# Altium PCB PCB1.PcbDoc
Units mm, origin at the board's own origin, x right, y up, seen from the top; angles counter-clockwise.
Board outline 80 x 80 mm, 2 copper layers (Top Layer, Bottom Layer); 45 components, 26 nets, 177 pads, 19 vias.
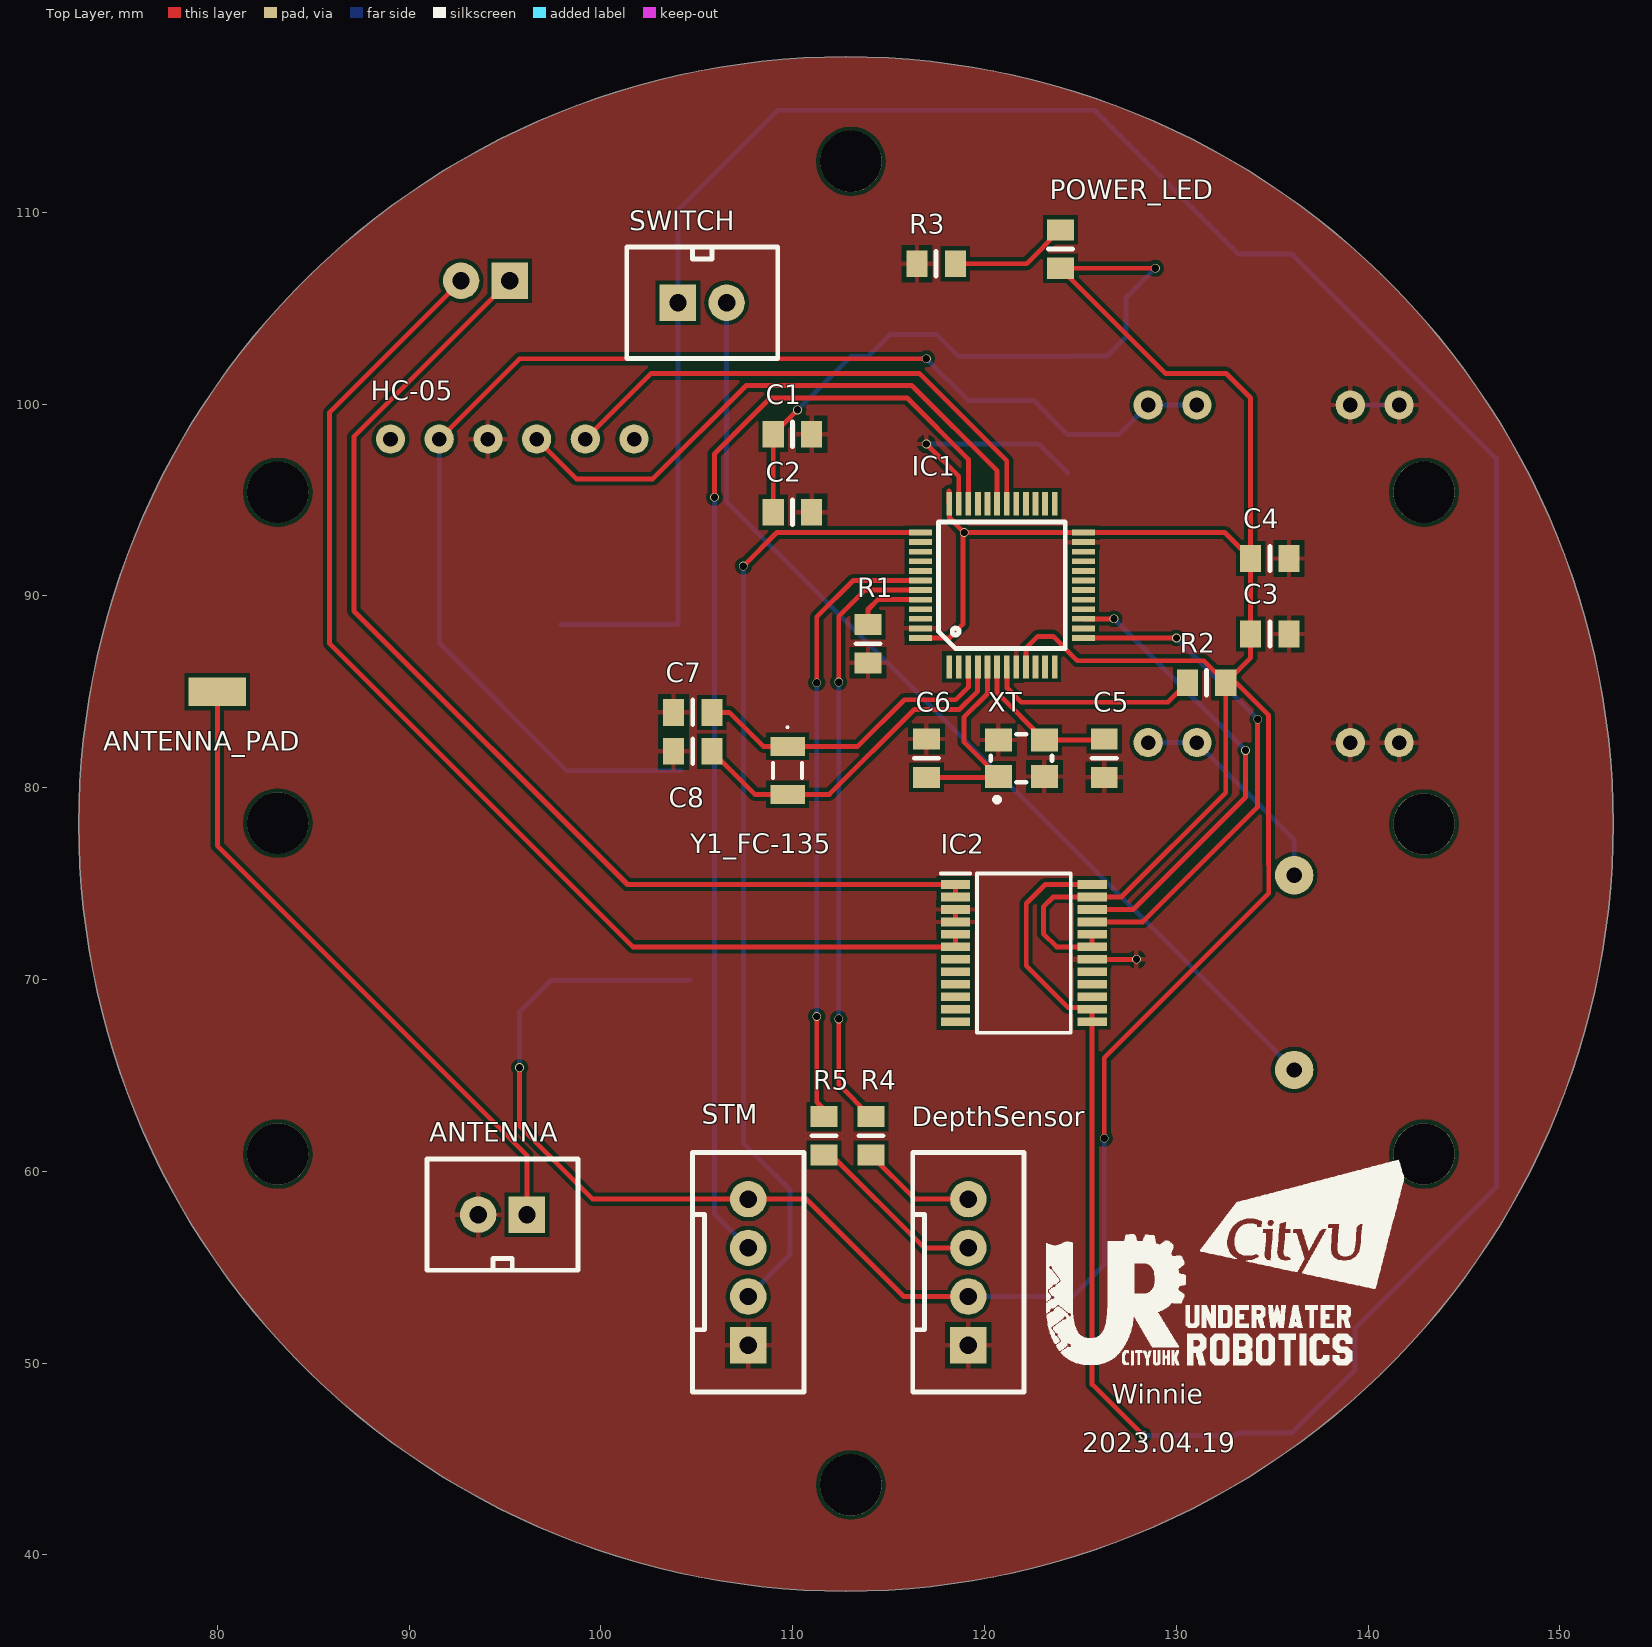
[diagram p0: Top Layer view]
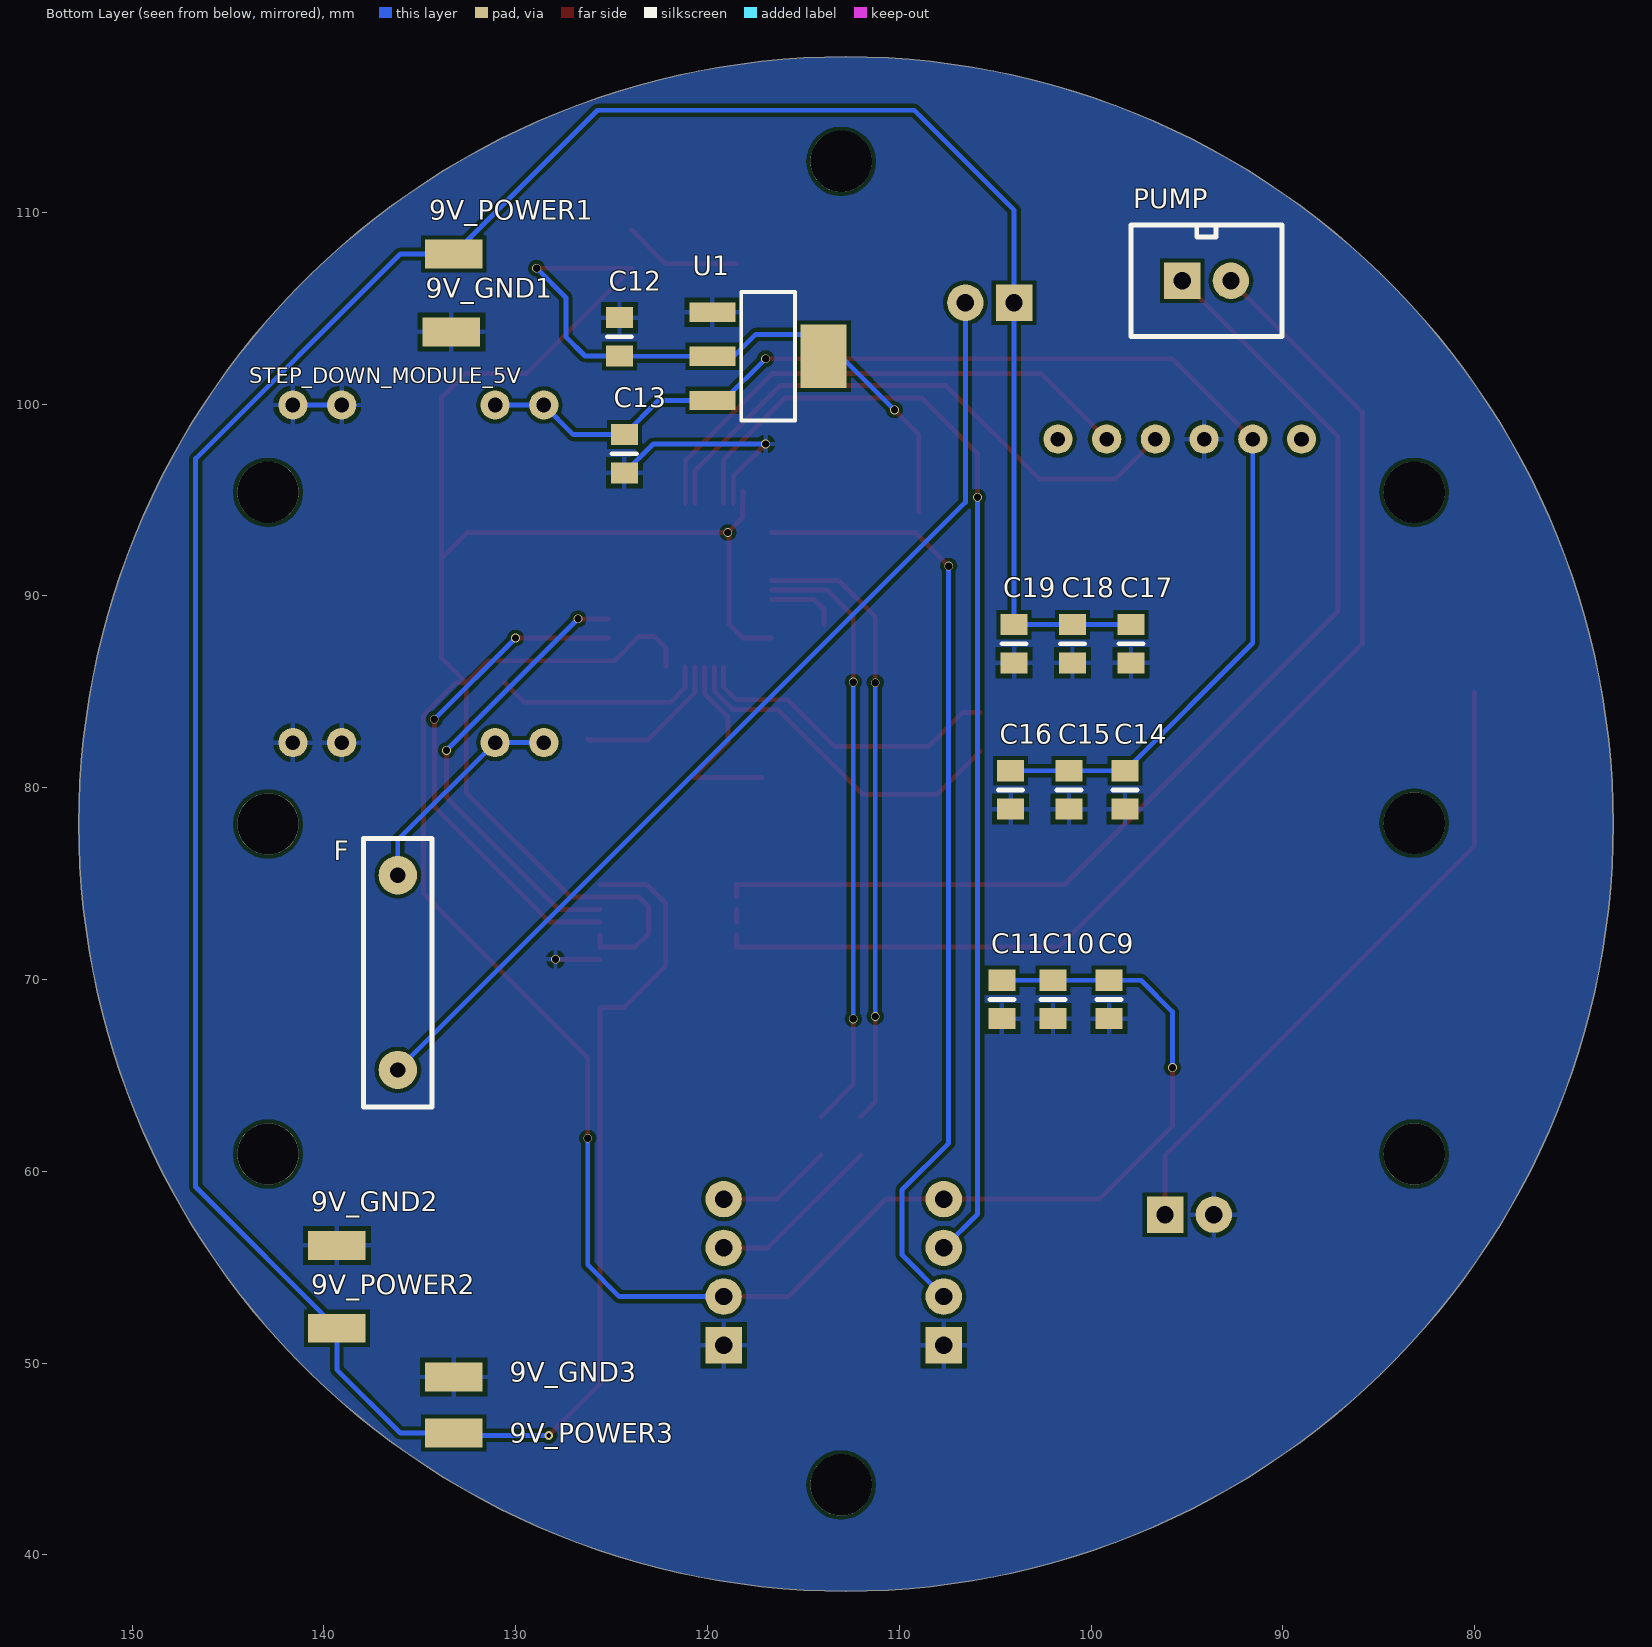
[diagram p1: Bottom Layer view, seen from below]
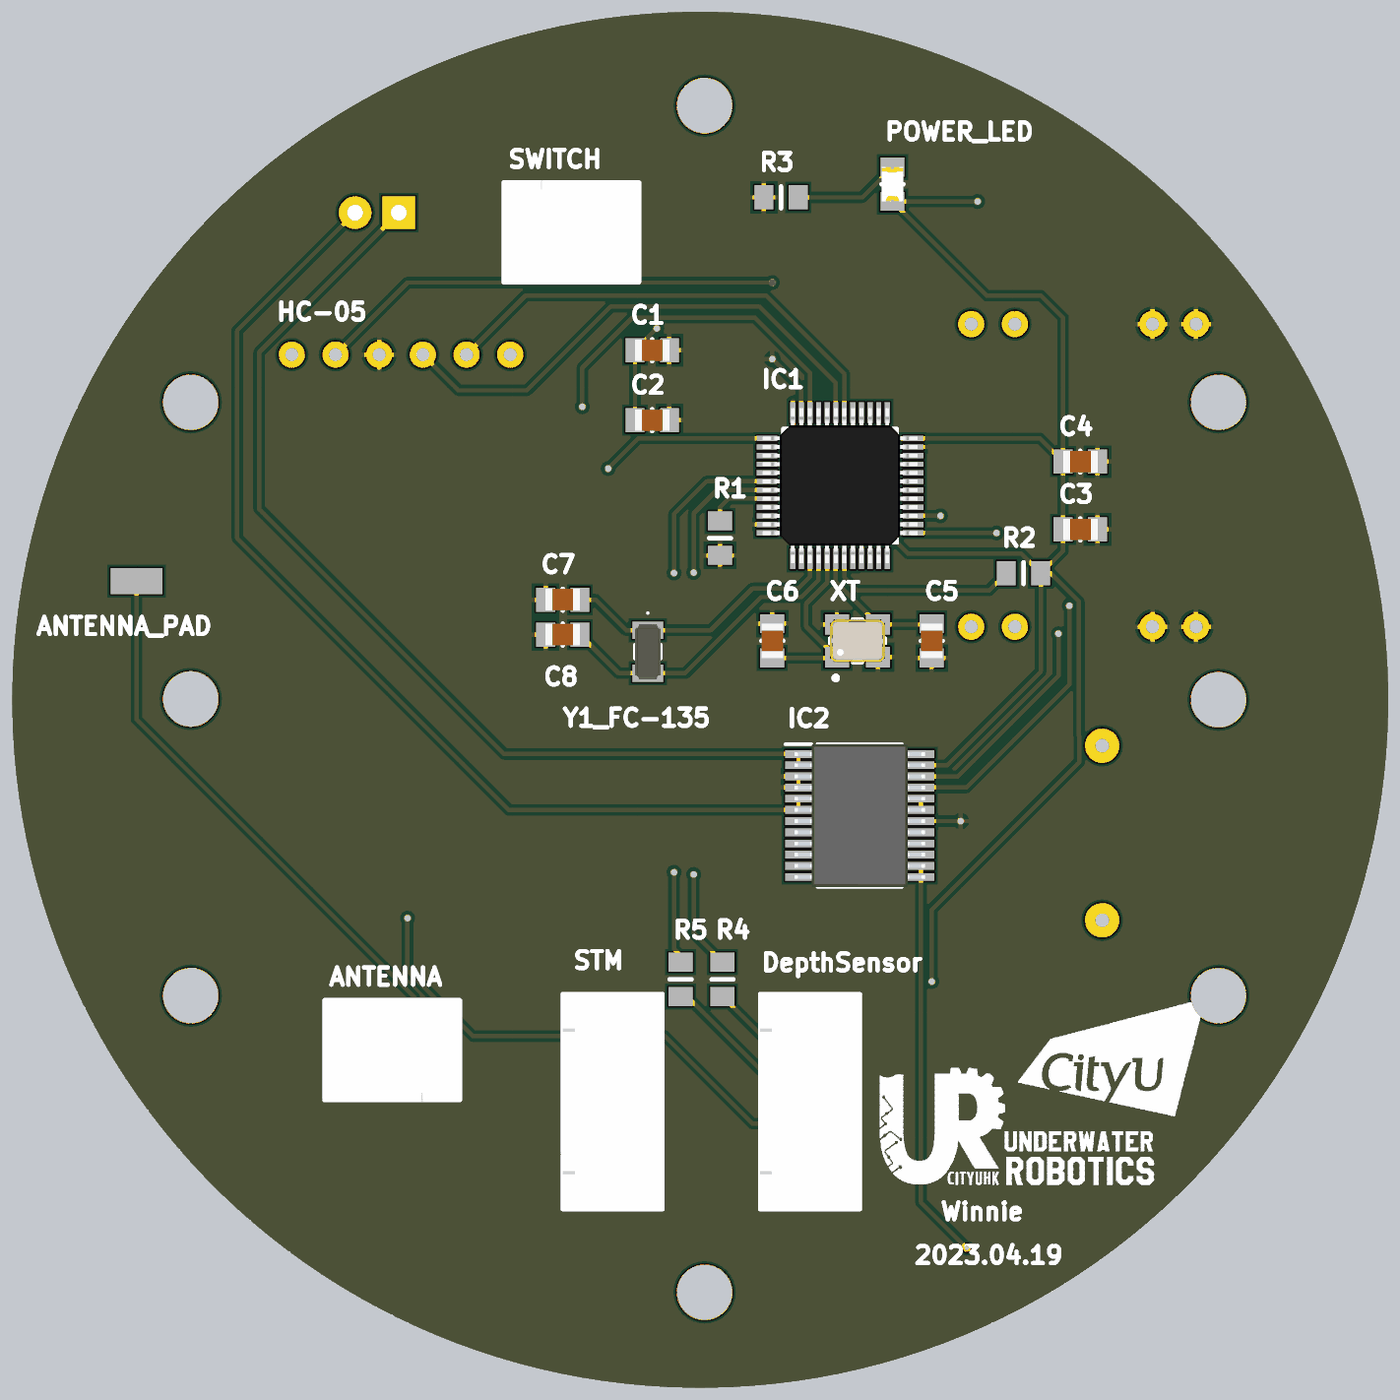
[diagram p2: 3D render of the assembled board from above, using the file's embedded part models]
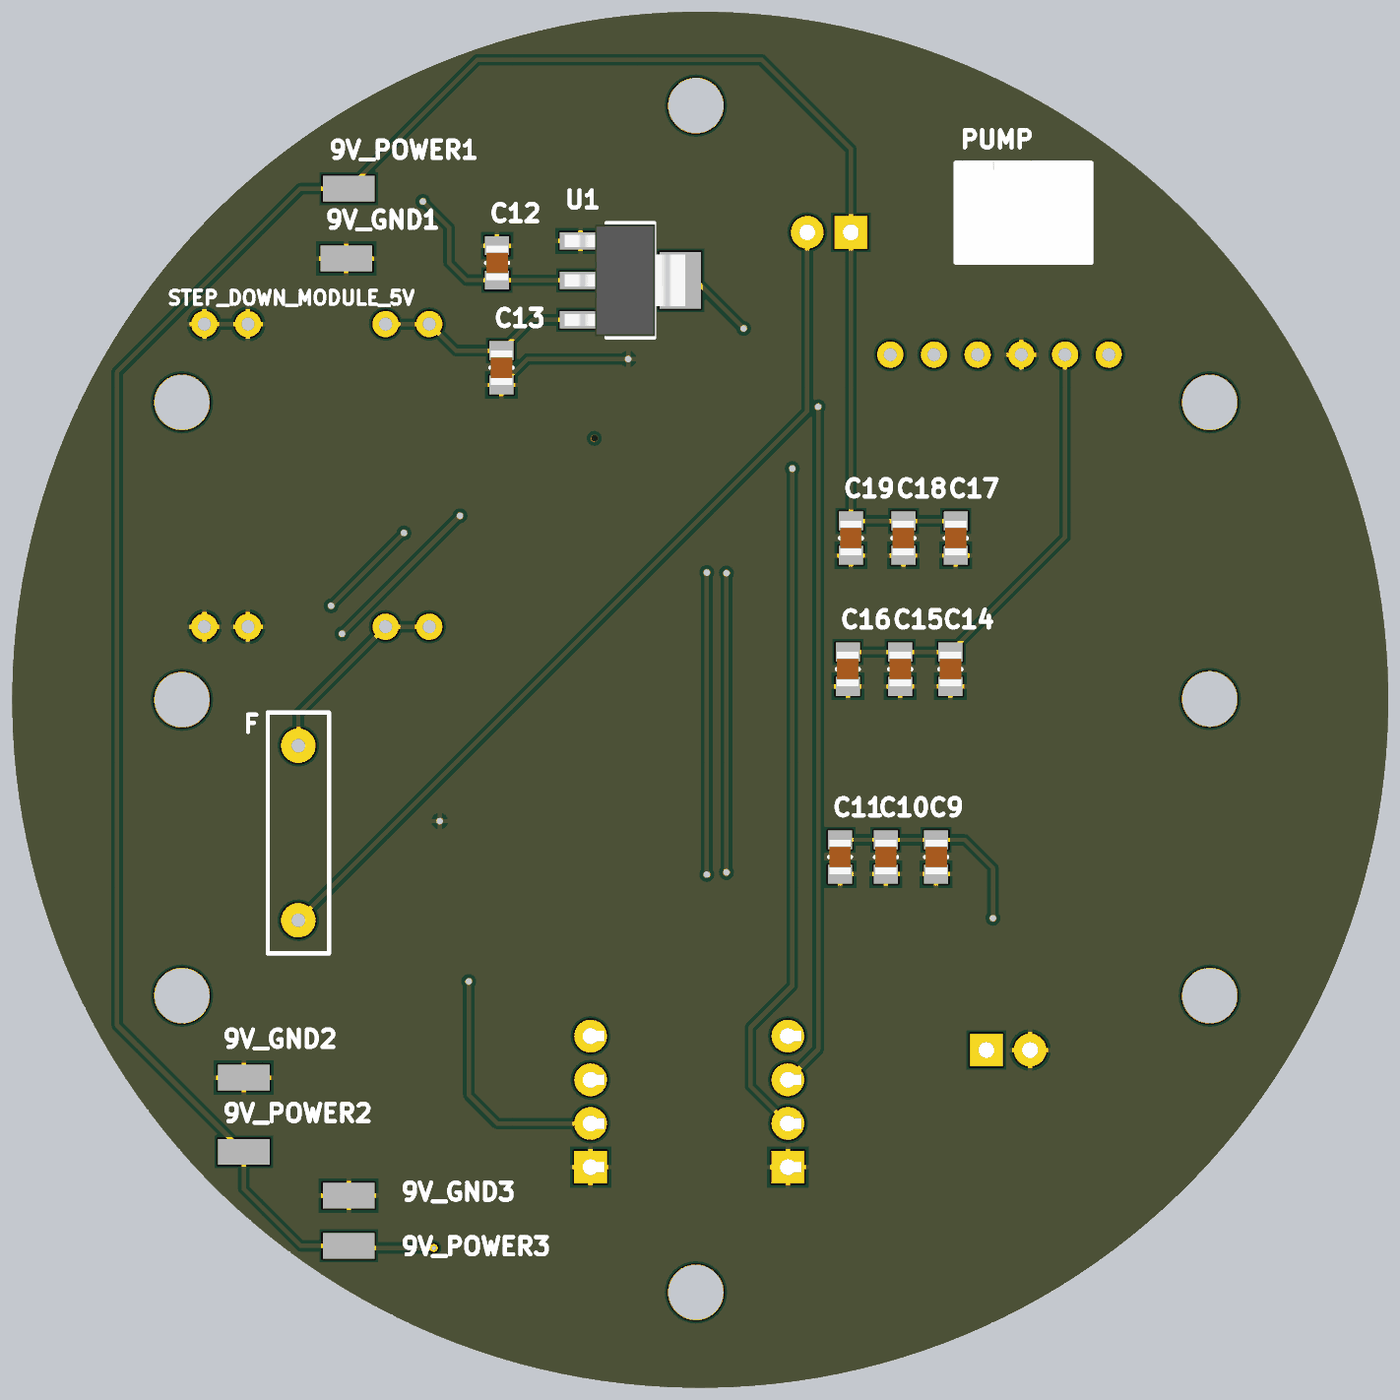
[diagram p3: 3D render of the assembled board from below, using the file's embedded part models]

## Layer stack, top to bottom
Top Solder: solder mask 0.0102, Solder Resist, Dk 3.5
Top Layer: signal copper 0.0356
Dielectric 1: dielectric 0.32, FR-4, Dk 4.8
Bottom Layer: signal copper 0.0356
Bottom Solder: solder mask 0.0102, Solder Resist, Dk 3.5

## Board outline
72.776,78.105 ccw(c112.776,78.105) 112.776,38.105 ccw(c112.776,78.105) 152.776,78.105 ccw(c112.776,78.105) 112.776,118.105 ccw(c112.776,78.105)

## Design rules (kind name [scope] priority, off if disabled: settings)
Clearance [All] p1: gap=0.203 ignorepadtopadclearanceinfootprint=TRUE
PolygonConnect [All] p1: connectstyle=Relief reliefconductorwidth=0.254 reliefentries=4 polygonreliefangle="90 Angle" airgapwidth=0.254
RoutingVias [All] p1: holewidth=0.711 width=1.27 viastyle="Through Hole" minholewidth=0.711 minwidth=1.27 maxholewidth=0.711 maxwidth=1.27
SolderMaskExpansion [All] p1: expansion=0.102
Width [All] p1: maxlimit=0.254 minlimit=0.254 preferedwidth=0.254
30 further rules are at their usual default settings.

## Components (designator, comment, footprint, x,y, rotation, side; value= is the part's Value field where it differs from the comment)
9V_GND1 "1-Pin Pad" "1-Pin Pad"#1 133.35,103.759 r90 bottom
9V_GND2 "1-Pin Pad" "1-Pin Pad"#1 139.319,56.134 r90 bottom
9V_GND3 "1-Pin Pad" "1-Pin Pad"#2 123.622,47.758 r90 bottom
9V_POWER1 "1-Pin Pad" "1-Pin Pad"#1 133.223,107.823 r90 bottom
9V_POWER2 "1-Pin Pad" "1-Pin Pad"#1 139.319,51.816 r90 bottom
9V_POWER3 "1-Pin Pad" "1-Pin Pad"#3 123.622,46.355 r90 bottom
ANTENNA "2Pin" XH2.54-2pin 94.869,57.737 r180 top
ANTENNA_PAD "1-Pin Pad" "1-Pin Pad"#4 102.997,51.435 r90 top
C1 "100pF" C0805 109.982,98.425 r180 top
C2 "100pF" C0805 109.982,94.361 r0 top
C3 "100pF" C0805 134.874,88.011 r0 top
C4 "100pF" C0805 134.874,91.948 r180 top
C5 "22pF" C0805 126.238,81.534 r90 top
C6 "22pF" C0805 116.967,81.534 r270 top
C7 "12.5pF" C0805 104.783,83.927 r0 top
C8 "12.5pF" C0805 104.783,81.895 r0 top
C9 "100pF" C0805 99.06,68.961 r90 bottom
C10 "100pF" C0805 101.981,68.961 r90 bottom
C11 "100pF" C0805 104.648,68.961 r90 bottom
C12 "100nF" C0805 124.587,103.505 r270 bottom
C13 "100nF" C0805 124.333,97.409 r90 bottom
C14 "100pF" C0805 98.227,79.883 r90 bottom
C15 "100pF" C0805 101.148,79.883 r90 bottom
C16 "100pF" C0805 104.196,79.883 r90 bottom
C17 "100pF" C0805 97.917,87.503 r90 bottom
C18 "100pF" C0805 100.965,87.503 r90 bottom
C19 "100pF" C0805 104.013,87.503 r90 bottom
DepthSensor "DepthSensor" XH2.54-4pin 119.154,54.737 r90 top (schematic designator P2)
F "Fuse" "FUSE-PPTC-30V - 5A" 136.144,70.358 r90 bottom
HC-05 "Bluetooth" hc-05 89.027,98.171 r0 top
IC1 "STM32F103C8T6" LQFP48 120.904,90.551 r0 top
IC2 "TB6612FNG_O,EL_" SOP65P760X160-24N 122.047,71.374 r0 top
POWER_LED "LED" LED-0805 123.952,108.077 r90 top
PUMP "2Pin" XH2.54-2pin 93.98,106.426 r180 bottom
R1 "10K" R0805 113.924,87.503 r270 top
R2 "10K" R0805 131.572,85.471 r180 top
R3 "10K" R0805 117.475,107.315 r0 top
R4 "1K" R0805 114.074,61.849 r90 top
R5 "1K" R0805 111.633,61.849 r90 top
STEP_DOWN_MODULE_5V "STEP_DOWN_MODULE_5V" STEP_DOWN_MODULE_5V 141.61,82.349 r90 bottom
STM "STM" XH2.54-4pin 107.68,54.737 r90 top (schematic designator P1)
SWITCH "2Pin" XH2.54-2pin 105.283,105.283 r0 top
U1 "AMS1117_5Vto3.3V" "AMS1117 - SOT-223" 116.84,102.489 r180 bottom
XT "8MhZ" 3225-P 121.92,81.534 r0 top
Y1_FC-135 "32.7680K" FC135327680KAAG0 109.728,80.899 r270 top

## Footprints (in the part's own frame and the unit in brackets; to place one, negate y for a bottom-side part, rotate by r counter-clockwise, add the part's x,y. Pads: shape width x height; smd on the part's side, far side on the other; paste and mask are expansions set on the pad)
"1-Pin Pad"#1 [mm]
  rect 1.5x3 smd: 1(0,0)
"1-Pin Pad"#2 [mm]
  rect 1.5x3 smd: 1(1.518,9.601)
"1-Pin Pad"#3 [mm]
  rect 1.5x3 smd: 1(0,9.601)
"1-Pin Pad"#4 [mm]
  rect 1.5x3 smd: 1(33.565,22.997)
3225-P [mm]
  rect 1.4x1.2 smd: 1(-1.2,-0.95) 2(-1.2,0.95) 2(1.2,-0.95) 3(1.2,0.95)
  silkscreen extent -1.6,-2.29 1.6,1.25, body extent -1.6,-1.25 1.6,1.25, height 0.61
"AMS1117 - SOT-223" [mm] "Tab is Output"
  rect 2.4x1 smd: 1(-2.9,2.3) 2(-2.9,0) 3(-2.9,-2.3)
  rect 2.4x3.3 smd: 2(2.9,0)
  silkscreen extent -1.4,-3.35 1.4,3.35, body extent -3.81,-3.25 3.19,3.25, height 1.59
C0805 [mm]
  rect 1.1x1.4 smd: 1(-1,0) 2(1,0)
  silkscreen extent 0,-0.64 0,0.64, body extent -1,-0.62 1,0.63, height 0.6
FC135327680KAAG0 [mm]
  rect 1x1.8 smd: 1(-1.25,0) 2(1.25,0)
  silkscreen extent -2.3,-0.75 0.4,0.75, body extent -1.6,-0.75 1.6,0.75, height 0.9
"FUSE-PPTC-30V - 5A" [mm]
  round 2 hole 0.8: 1(-5.075,0) 2(5.075,0)
  silkscreen extent -7,-1.78 7,1.78
hc-05 [mil]
  round 60 hole 30: 1(0,0) 2(100,0) 3(200,0) 4(300,0) 5(400,0) 6(500,0)
LED-0805 [mm]
  rect 1.1x1.4 smd: 1(-1,0) 2(1,0)
  silkscreen extent 0,-0.64 0,0.64, body extent -1,-0.62 1,0.63, height 0.81
LQFP48 [mm]
  rect 0.3x1.2 smd: 1(-2.75,-4.25) 2(-2.25,-4.25) 3(-1.75,-4.25) 4(-1.25,-4.25) 5(-0.75,-4.25) 6(-0.25,-4.25) 7(0.25,-4.25) 8(0.75,-4.25) 9(1.25,-4.25) 10(1.75,-4.25) 11(2.25,-4.25) 12(2.75,-4.25) 25(2.75,4.25) 26(2.25,4.25) 27(1.75,4.25) 28(1.25,4.25) 29(0.75,4.25) 30(0.25,4.25) 31(-0.25,4.25) 32(-0.75,4.25) 33(-1.25,4.25) 34(-1.75,4.25) 35(-2.25,4.25) 36(-2.75,4.25)
  rect 1.2x0.3 smd: 13(4.25,-2.75) 14(4.25,-2.25) 15(4.25,-1.75) 16(4.25,-1.25) 17(4.25,-0.75) 18(4.25,-0.25) 19(4.25,0.25) 20(4.25,0.75) 21(4.25,1.25) 22(4.25,1.75) 23(4.25,2.25) 24(4.25,2.75) 37(-4.25,2.75) 38(-4.25,2.25) 39(-4.25,1.75) 40(-4.25,1.25) 41(-4.25,0.75) 42(-4.25,0.25) 43(-4.25,-0.25) 44(-4.25,-0.75) 45(-4.25,-1.25) 46(-4.25,-1.75) 47(-4.25,-2.25) 48(-4.25,-2.75)
  silkscreen extent -3.3,-3.3 3.3,3.3, body extent -4.5,-4.5 4.5,4.5, height 1.47
R0805 [mm]
  rect 1.1x1.4 smd: 1(-1,0) 2(1,0)
  silkscreen extent 0,-0.64 0,0.64, body extent -0.25,0.25 -0.25,0.25, height 0.25
SOP65P760X160-24N [mm]
  rect 1.525x0.45 smd: 1(-3.562,3.575) 2(-3.562,2.925) 3(-3.562,2.275) 4(-3.562,1.625) 5(-3.562,0.975) 6(-3.562,0.325) 7(-3.562,-0.325) 8(-3.562,-0.975) 9(-3.562,-1.625) 10(-3.562,-2.275) 11(-3.562,-2.925) 12(-3.562,-3.575) 13(3.562,-3.575) 14(3.562,-2.925) 15(3.562,-2.275) 16(3.562,-1.625) 17(3.562,-0.975) 18(3.562,-0.325) 19(3.562,0.325) 20(3.562,0.975) 21(3.562,1.625) 22(3.562,2.275) 23(3.562,2.925) 24(3.562,3.575)
  silkscreen extent -4.33,-4.15 2.45,4.15, body extent -3.8,-4.15 3.8,4.15, height 1.6
STEP_DOWN_MODULE_5V [mil]
  round 60 hole 30: 1(0,-100) 1(0,0) 2(0,-514.96) 2(0,-414.96) 3(692.91,-100) 3(692.91,0) 4(692.91,-514.96) 4(692.91,-414.96)
XH2.54-2pin [mm]
  rect 1.9x1.9 hole 0.9: 1(-1.27,0)
  round 1.9 hole 0.9: 2(1.27,0)
  silkscreen extent -3.94,-2.9 3.94,2.9, body extent -4,-3 4,3, height 7
XH2.54-4pin [mm]
  rect 1.9x1.9 hole 0.9: 1(-3.81,0)
  round 1.9 hole 0.9: 2(-1.27,0) 3(1.27,0) 4(3.81,0)
  silkscreen extent -6.25,-2.9 6.25,2.9, body extent -6.25,-2.9 6.25,2.9, height 7

## Part data
C1 C2 C3 C4 C5 C6 C7 C8 C9 C10 C11 C12 C13 C14 C15 C16 C17 C18 C19: library part Cap
DepthSensor STM: library part 4Pin
F: "PPTC", ComponentLink1Description=Datasheet, ComponentLink1URL=https://www.flying1688.com/products_detail_1566.htm
HC-05: library part HC-05
IC2: "Integrated Circuit", Manufacturer_Name=Toshiba, Manufacturer_Part_Number=TB6612FNG(O,EL), Mouser Part Number=757-TB6612FNG(O,EL), Datasheet Link=https://th.mouser.com/datasheet/2/408/TB6612FNG_datasheet_en_20141001-708260.pdf, Height=1.6mm, Mouser Price/Stock=https://www.mouser.co.uk/ProductDetail/Toshiba/TB6612FNGOEL?qs=%2FbfygUuxYr5ys7QLPOzyng%3D%3D
R1 R2 R3 R4 R5: library part Resistor_1
U1: library part AMS1117
XT: library part "Passive Crystal"
Y1_FC-135: library part FC-135_32.7680KA-AG0, "Crystal or Oscillator", Arrow Part Number="FC-135 32.7680KA-AG0", Manufacturer_Name="Epson Timing", Mouser Part Number=732-FC135-32.76KAAG0, Arrow Price/Stock=https://www.arrow.com/en/products/fc-13532.7680ka-ag0/epson-electronics-america?region=nac, Datasheet Link=https://support.epson.biz/td/api/doc_check.php?dl=brief_FC-135&lang=en/.pdf, Height=0.9mm, Manufacturer_Part_Number="FC-135 32.7680KA-AG0", Mouser Price/Stock=https://www.mouser.co.uk/ProductDetail/Epson-Timing/FC-135-32.7680KA-AG0?qs=l3LL3yk8ONZCQSM4diwOUg%3D%3D

## Free pads (board coordinates)
  round 3.2 hole 3.2: 16(83.152,60.899) 17(83.152,95.399) 18(113.03,112.649) 19(113.03,43.649) 20(142.908,60.899) 21(142.908,95.399) 22(83.152,78.149) 23(142.908,78.105)

## Via types
v1: diameter 0.457, hole 0.381, Top Layer to Bottom Layer, tented both sides, 18 vias
v2: diameter 0.457, hole 0.254, Top Layer to Bottom Layer, 1 vias

## Nets (pads, with @x,y where several pads share a name; then routed paths per layer and width w, separated by ;. In a path a pad name is that pad's centre, name@x,y a point inside that pad or via, vN(x,y) a via of type N, cw(c..) or ccw(c..) an arc to the next point about the centre after c; other vN are vias at no path point)
3.3V: C1.2 C2.1 C3.1 C4.2 C9.2 C10.2 C11.2 C12.2 DepthSensor.2 IC1.9 IC1.24 IC1.36 IC1.48 IC2.19 IC2.20 IC2.23 POWER_LED.1 R2.1 STM.4 U1.2 | length 208.8
  Top Layer w0.254: v1(95.758,65.405) 95.758,62.357 99.568,58.547 STM.4 110.719,58.547 115.799,53.467 DepthSensor.2 ; C2.1 C1.2 v1(110.252,99.695) ; IC1.48@116.674,87.821 IC1.48 118.154,87.801 118.872,88.519 118.872,93.366 118.174,94.064 118.174,94.781 IC1.36 118.154,95.46 ; v1(118.937,93.301) IC1.24 132.521,93.301 C4.2 ; IC1.9 122.154,87.269 122.769,87.884 123.571,87.884 124.841,86.614 131.429,86.614 R2.1 ; IC2.20 IC2.19 123.754,71.699 123.063,72.39 123.063,73.784 123.578,74.299 IC2.23 127.131,74.299 132.572,79.74 R2.1 ; v1(126.238,61.722) 126.238,65.913 134.814,74.489 134.814,75.984 134.798,76 134.798,83.797 133.124,85.471 R2.1 ; v1(128.905,107.077) POWER_LED.1 129.429,101.6 132.588,101.6 133.874,100.314 C4.2 ; R2.1 133.874,86.773 C3.1 C4.2
  Bottom Layer w0.254: v1(95.758,65.405) 95.758,68.322 97.397,69.961 C9.2 C10.2 C11.2 ; v1(110.252,99.695) 113.046,102.489 113.94,102.489 115.083,103.632 117.475,103.632 118.618,102.489 119.74,102.489 124.571,102.489 C12.2 126.381,102.505 127.381,103.505 127.381,105.553 v1(128.905,107.077) ; DepthSensor.2 124.587,53.467 126.238,55.118 v1(126.238,61.722)
5V: C13.2 C14.2 C15.2 C16.2 HC-05.2 STEP_DOWN_MODULE_5V.4 U1.3 | length 69.5
  Top Layer w0.254: HC-05.2 95.758,102.362 v1(116.967,102.362)
  Bottom Layer w0.254: HC-05.2 91.567,87.543 C14.2 C15.2 C16.2 ; v1(116.967,102.362) 119.14,100.189 U1.3 122.553,100.189 C13.2 126.99,98.409 128.53,99.949 STEP_DOWN_MODULE_5V.4@131.07,99.949
9V: 9V_POWER1.1 9V_POWER2.1 9V_POWER3.1 C17.2 C18.2 C19.2 IC2.13 IC2.14 IC2.24 SWITCH.1 | length 177.9
  Top Layer w0.254: IC2.24 123.165,74.949 122.174,73.958 122.174,70.717 124.347,68.544 125.514,68.544 IC2.14 IC2.13 125.609,48.889 v2(128.27,46.228)
  Bottom Layer w0.254: C17.2 C18.2 C19.2 SWITCH.1 104.013,110.109 109.22,115.316 125.73,115.316 9V_POWER1.1 136.017,107.823 146.685,97.155 146.685,59.182 9V_POWER2.1 139.319,49.657 136.017,46.355 9V_POWER3.1 133.096,46.228 v2(128.27,46.228)
AN_PAD: ANTENNA.1 ANTENNA_PAD.1 | length 33.9
  Top Layer w0.254: ANTENNA_PAD.1 80,76.972 96.139,60.833 ANTENNA.1
GND: 9V_GND1.1 9V_GND2.1 9V_GND3.1 ANTENNA.2 C1.1 C2.2 C3.2 C4.1 C5.1 C6.1 C7.1 C8.1 C9.1 C10.1 C11.1 C12.1 C13.1 C14.1 C15.1 C16.1 C17.1 C18.1 C19.1 DepthSensor.1 HC-05.3 IC1.8 IC1.23 IC1.35 IC1.47 IC2.3 IC2.4 IC2.18 R1.2 R3.1 STEP_DOWN_MODULE_5V.1 STEP_DOWN_MODULE_5V.3 STM.1 U1.1 XT.2 | length 17.3
  Top Layer w0.254: v1(116.967,97.917) 118.654,96.23 IC1.35 ; IC2.4 IC2.3 ; IC2.18 v1(127.924,71.049)
  Bottom Layer w0.254: v1(116.967,97.917) 122.825,97.917 C13.1 ; STEP_DOWN_MODULE_5V.3@139.07,99.949 STEP_DOWN_MODULE_5V.3@141.61,99.949
NetF_1: F.1 SWITCH.2 | length 52.3
  Bottom Layer w0.254: SWITCH.2 106.553,94.874 F.1
NetF_2: F.2 STEP_DOWN_MODULE_5V.2 | length 11.6
  Bottom Layer w0.254: STEP_DOWN_MODULE_5V.2@128.53,82.349 131.07,82.349 136.144,77.275 F.2
NetIC1_7: IC1.7 R2.2 | length 11.2
  Top Layer w0.254: IC1.7 121.174,86.281 121.174,85.201 121.92,84.455 129.556,84.455 R2.2
NetIC1_44: IC1.44 R1.1 | length 3.8
  Top Layer w0.254: R1.1 113.924,89.286 114.439,89.801 IC1.44 IC1.44@116.634,89.781
NetP2_3: DepthSensor.3 R5.1 | length 9.1
  Top Layer w0.254: R5.1@112.014,60.849 116.856,56.007 DepthSensor.3
NetP2_4: DepthSensor.4 R4.1 | length 6
  Top Layer w0.254: R4.1 116.376,58.547 DepthSensor.4
NetPOWER_LED_2: POWER_LED.2 R3.2 | length 6.2
  Top Layer w0.254: R3.2 122.19,107.315 POWER_LED.2
OSC32_IN: C7.2 IC1.3 Y1_FC-135.1 | length 16.4
  Top Layer w0.254: C7.2 106.684,83.927 108.462,82.149 Y1_FC-135.1 113.391,82.149 115.824,84.582 118.491,84.582 119.154,85.245 IC1.3
OSC32_OUT: C8.2 IC1.4 Y1_FC-135.2 | length 18.3
  Top Layer w0.254: C8.2 108.029,79.649 Y1_FC-135.2 111.907,79.649 116.332,84.074 118.676,84.074 119.634,85.032 119.634,86.281 IC1.4
OSC_IN: C6.2 IC1.5 XT.1 | length 10.6
  Top Layer w0.254: C6.2@117.15,80.534 120.67,80.534 XT.1 118.937,82.367 118.937,83.689 120.154,84.906 IC1.5
OSC_OUT: C5.2 IC1.6 XT.3 | length 8
  Top Layer w0.254: IC1.6 120.654,84.95 XT.3 126.188,82.484 C5.2
Pump1: IC1.13 IC2.21 | length 26.5
  Top Layer w0.254: IC1.13 v1(130.004,87.801) ; IC2.21 128.244,72.999 134.239,78.994 v1(134.239,83.566)
  Bottom Layer w0.254: v1(130.004,87.801) v1(134.239,83.566)
Pump2: IC1.15 IC2.22 | length 24.1
  Top Layer w0.254: IC1.15 v1(126.746,88.801) ; IC2.22 127.747,73.649 133.604,79.506 v1(133.604,81.943)
  Bottom Layer w0.254: v1(126.746,88.801) v1(133.604,81.943)
Pump_G: IC2.5 IC2.6 PUMP.2 | length 61.6
  Top Layer w0.254: PUMP.2 85.852,99.568 85.852,87.503 101.656,71.699 IC2.6 IC2.5
Pump_v: IC2.1 IC2.2 PUMP.1 | length 58.5
  Top Layer w0.254: PUMP.1 87.122,98.298 87.122,89.21 101.383,74.949 IC2.1 IC2.2
RXD: HC-05.5 IC1.30 | length 27.5
  Top Layer w0.254: HC-05.5 102.616,101.6 116.596,101.6 121.154,97.042 IC1.30
SCL: IC1.42 R5.2 | length 32.7
  Top Layer w0.254: v1(111.252,68.072) 111.252,63.611 R5.2@112.014,62.849 ; v1(111.252,85.471) 111.252,88.9 113.153,90.801 IC1.42
  Bottom Layer w0.254: v1@111.252,67.945 v1(111.252,68.072) v1(111.252,85.471)
SDA: IC1.43 R4.2 | length 31.6
  Top Layer w0.254: v1(112.395,67.945) 112.395,64.528 R4.2 ; v1(112.395,85.502) 112.395,88.936 113.76,90.301 IC1.43
  Bottom Layer w0.254: v1(112.395,67.945) v1(112.395,85.502)
SWCLK: IC1.37 STM.2 | length 49.9
  Top Layer w0.254: v1(107.424,91.549) 109.176,93.301 IC1.37
  Bottom Layer w0.254: v1(107.424,91.549) 107.424,61.47 109.855,59.039 109.855,55.642 STM.2
SWDIO: IC1.34 STM.3 | length 60.2
  Top Layer w0.254: v1(105.918,95.139) 105.918,97.409 108.823,100.314 115.964,100.314 119.154,97.124 IC1.34
  Bottom Layer w0.254: v1(105.918,95.139) 105.918,57.769 STM.3
TXD: HC-05.4 IC1.31 | length 30.4
  Top Layer w0.254: HC-05.4 98.723,96.095 102.699,96.095 107.569,100.965 116.205,100.965 120.654,96.516 IC1.31
pads on no net: HC-05.1 HC-05.6 IC1.1 IC1.2 IC1.10 IC1.11 IC1.12 IC1.14 IC1.16 IC1.17 IC1.18 IC1.19 IC1.20 IC1.21 IC1.22 IC1.25 IC1.26 IC1.27 IC1.28 IC1.29 IC1.32 IC1.33 IC1.38 IC1.39 IC1.40 IC1.41 IC1.45 IC1.46 IC2.7 IC2.8 IC2.9 IC2.10 IC2.11 IC2.12 IC2.15 IC2.16 IC2.17

## Polygon pours and split planes (outlines as drawn)
GND on Top Layer "GND_L01_P036" (solid, pour order 36): 72.776,78.105 ccw(c112.776,78.105) 112.776,38.105 ccw(c112.776,78.105) 152.776,78.105 ccw(c112.776,78.105) 112.776,118.105 ccw(c112.776,78.105)
GND on Bottom Layer "GND_L02_P037" (solid, remove dead copper, pour order 37): 72.776,78.105 ccw(c112.776,78.105) 112.776,38.105 ccw(c112.776,78.105) 152.776,78.105 ccw(c112.776,78.105) 112.776,118.105 ccw(c112.776,78.105)

## Other copper
Bottom Layer:
  pour cut-out: 81.28,103.124

## Silkscreen, mask and mechanical layers (free items; w line width, h text height)
Top Overlay:
  drawing of 4125 lines, arcs and shapes, not listed
  text "Winnie" at 126.622,47.879 h1
  text "2023.04.19" at 125.095,45.339 h1
Mechanical 13:
  circle w0.254: c112.649,78.105 r40